# Altium PCB PowerModule.PcbDoc (part 2 of 3)
Units mm, origin at the board's own origin, x right, y up, seen from the top; angles counter-clockwise.
Board outline 200 x 99.95 mm, 2 copper layers (Top Layer 1, Bottom Layer 1); 228 components, 131 nets, 701 pads, 207 vias.
Unrouted connection lines stored in the file: 344.
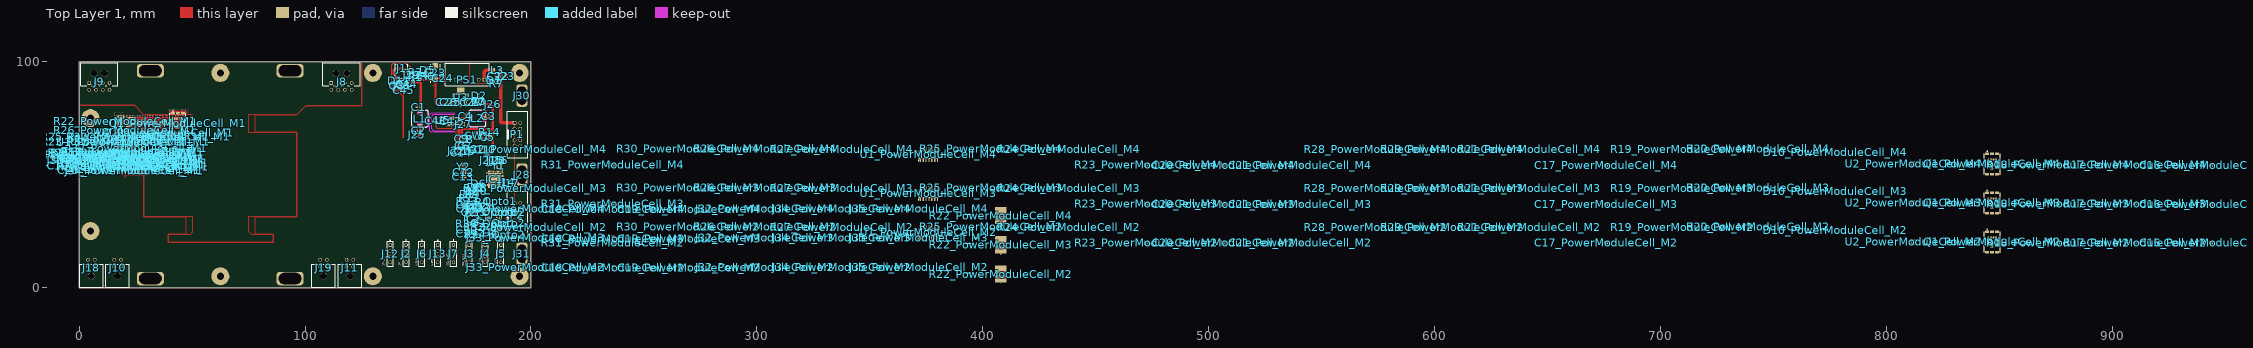
[diagram p0: Top Layer 1 view]

## Part data (continued)
J10 J11 J18 J19: library part CMP-04776-000002-1, "CONN HEADER R/A 4POS 3MM", Current Rating=8.5A, Manufacturer=Molex, Temperature="-40°C to +105°C", Temperature Range High=+105°C, Temperature Range Low=-40°C, Voltage Rating=600V, Automotive=No, Category=Conn, ComponentLink2Description=Datasheet, ComponentLink2URL=https://www.molex.com/webdocs/datasheets/pdf/en-us/0430450400_PCB_HEADERS.pdf, Conn Gender=Male, Conn Orientation="Right Angle", Contact Material=Tin,Nickel, Device Class L1=Connectors, Device Class L2="Headers and Wire Housings", Device Class L3=unset, Digikey Description="CONN HEADER R/A 4POS 3MM", Footprint Url=https://www.molex.com/pdm_docs/sd/430450400_sd.pdf, Height=9.27mm, Is Female=yes, Lead Free=Yes, Manufacturer Part Number=43045-0400, Number of Contacts=4, Number of Rows=2, Octopart=https://octopart.com/43045-0400-molex-287063, Package=43045-0400, Pitch=3mm, RoHS=TRUE
J14 J15 J16 J17 J20 J21 J22 J23 J24 J25 J26 J27 J28 J29 J30 J31 J32_PowerModuleCell_M1 J32_PowerModuleCell_M2 J32_PowerModuleCell_M3 J32_PowerModuleCell_M4 J33_PowerModuleCell_M1 J33_PowerModuleCell_M2 J33_PowerModuleCell_M3 J33_PowerModuleCell_M4 J34_PowerModuleCell_M1 J34_PowerModuleCell_M2 J34_PowerModuleCell_M3 J34_PowerModuleCell_M4 J35_PowerModuleCell_M1 J35_PowerModuleCell_M2 J35_PowerModuleCell_M3 J35_PowerModuleCell_M4: library part 61300111121, "Connector", Manufacturer_Name="Wurth Elektronik", Mouser Part Number=710-61300111121, Datasheet Link=https://katalog.we-online.de/em/datasheet/6130xx11121.pdf, Height=8.89mm, Manufacturer_Part_Number=61300111121, Mouser Price/Stock=https://www.mouser.co.uk/ProductDetail/Wurth-Elektronik/61300111121?qs=PhR8RmCirEaRH5Ck%252B2lRLQ%3D%3D
L1 L2: library part CMP-0227-00153-2, Ambient Temperature Range High=85°C, Ambient Temperature Range Low=-40°C, Current Rating=1.11A, DC Resistance (DCR)=145mΩ, Inductance=39µH, Max Operating Temperature=125°C, Self Resonant Frequency=11MHz, Tolerance=20%, Depth=7.3mm, Height=4.5mm, Length=7.3mm, Max DC Current=1.11A, Min Operating Temperature=-40°C, NexarPartId=29930417, Number of Pins=2, Packaging="Tape & Reel", RoHS=Compliant, Shielding=Shielded, Width=7.3mm
L3: library part CMP-1747-00008-1, "Chip Inductor / , 10 uH, +/- 10%, -40 to 125 degC, 1210 (3225 Metric), RoHS, Tape and Reel", Colour=White, Current Rating="1.5 A", Max Operating Temperature="85 degC", Min Operating Temperature="-55 degC", Package Quantity=100, ComponentLink1Description="Manufacturer URL", ComponentLink1URL=http://www.bourns.com/, ComponentLink2Description=Datasheet, ComponentLink2URL=http://www.bourns.com/docs/Product-Datasheets/cm322522.pdf, Connector Type=USB, Contact Material=Bronze, Contact Plating=Gold, DatasheetVersion=Aug-14, Gender=Female, Height="15.9 mm", Lead Pitch="2.5 mm", Mount="Through Hole", PackageDescription="2-Pin Surface Mount Device, Body 3.2 x 2.5 mm", PackageReference=1210, Packaging=Tray, Pins=4, Radiation Hardening=No, RoHSCompliant=true, Width="11.15 mm"
P1 P2: library part CMP-1502-00007-2, Color=Black, Contact Resistance=20mΩ, Current Rating=3A, Flammability Rating="UL94 V-0", Insulation Resistance=1GΩ, Max Operating Temperature=105°C, Min Operating Temperature=-40°C, Operating Supply Voltage=250V, Connector Type="Male Pin", Contact Gender=Male, Contact Material=Copper, Contact Plating=Gold, Gender=Male, Height=8.85mm, Housing Material=PBT, Insulation Material=PBT, Lead Free="Lead Free", Lead Pitch=2.54mm, Length=20.36mm, Mount="Through Hole", NexarPartId=8917783, Number of Contacts=10, Number of Pins=10, Number of Positions=10, Number of Rows=2, Orientation=Vertical, Pitch=2.54mm, REACH SVHC=Unknown, RoHS=Compliant, Row Spacing=2.54mm, Termination=Solder, Voltage Rating=250V, Voltage Rating (DC)=250V, Width=20.36mm
PS1: "Power Supply", Manufacturer_Name="Murata Electronics", Datasheet Link=https://www.murata.com/products/productdata/8822318989342/KDC-MGJ2B.pdf?1690255813000, Height=12.75mm, Manufacturer_Part_Number=MGJ2D122005BSC
Q1_PowerModuleCell_M1 Q1_PowerModuleCell_M2 Q1_PowerModuleCell_M3 Q1_PowerModuleCell_M4: library part CMP-32901-000937-1, "MOSFET N-CH 150V 375A DIRECTFET", Continuous Drain Current (ID)=375A, Drain to Source Resistance=11mR, Drain to Source Voltage (Vdss)=150V, Gate to Source Voltage (Vgs)=20V, Input Capacitance=6.66nF, Max Operating Temperature=175°C, Max Power Dissipation=125W, Min Operating Temperature=-55°C, Threshold Voltage=4V, Halogen Free="Halogen Free", Height=0.02inch, Lead Free="Lead Free", Length=0.36inch, Max Dual Supply Voltage=150V, Mount="Surface Mount", Number of Pins=11, Packaging="Cut Tape", Power Dissipation=125W, Rds On Max=11mR, REACH SVHC="No SVHC", RoHS Compliant=Yes, Series=HEXFET®, Turn-Off Delay Time=36ns, Turn-On Delay Time=16ns, Width=0.28inch
Q2_Opto1 Q2_Opto2: "Phototransistor", Manufacturer_Name=Toshiba, Manufacturer_Part_Number=TLP291(Y,SE(T, Datasheet Link=https://toshiba.semicon-storage.com/info/docget.jsp?did=12884&prodName=TLP291, Height=2.2mm
Q3: "Transistor", Manufacturer_Name=Vishay, Mouser Part Number=781-SI1029X-T1-GE3, Datasheet Link=https://www.vishay.com/docs/71435/71435.pdf, Height=0.6mm, Manufacturer_Part_Number=SI1029X-T1-GE3, Mouser Price/Stock=https://www.mouser.co.uk/ProductDetail/Vishay-Semiconductors/SI1029X-T1-GE3?qs=tWM4QuTcS4WFBF4Fada7Qg%3D%3D